# Altium PCB remote.PcbDoc (part 1 of 4)
Units mil, origin at the board's own origin, x right, y up, seen from the top; angles counter-clockwise.
Board outline 1653.54 x 3582.68 mil, 2 copper layers (Top Layer, Bottom Layer); 71 components, 53 nets, 248 pads, 250 vias.
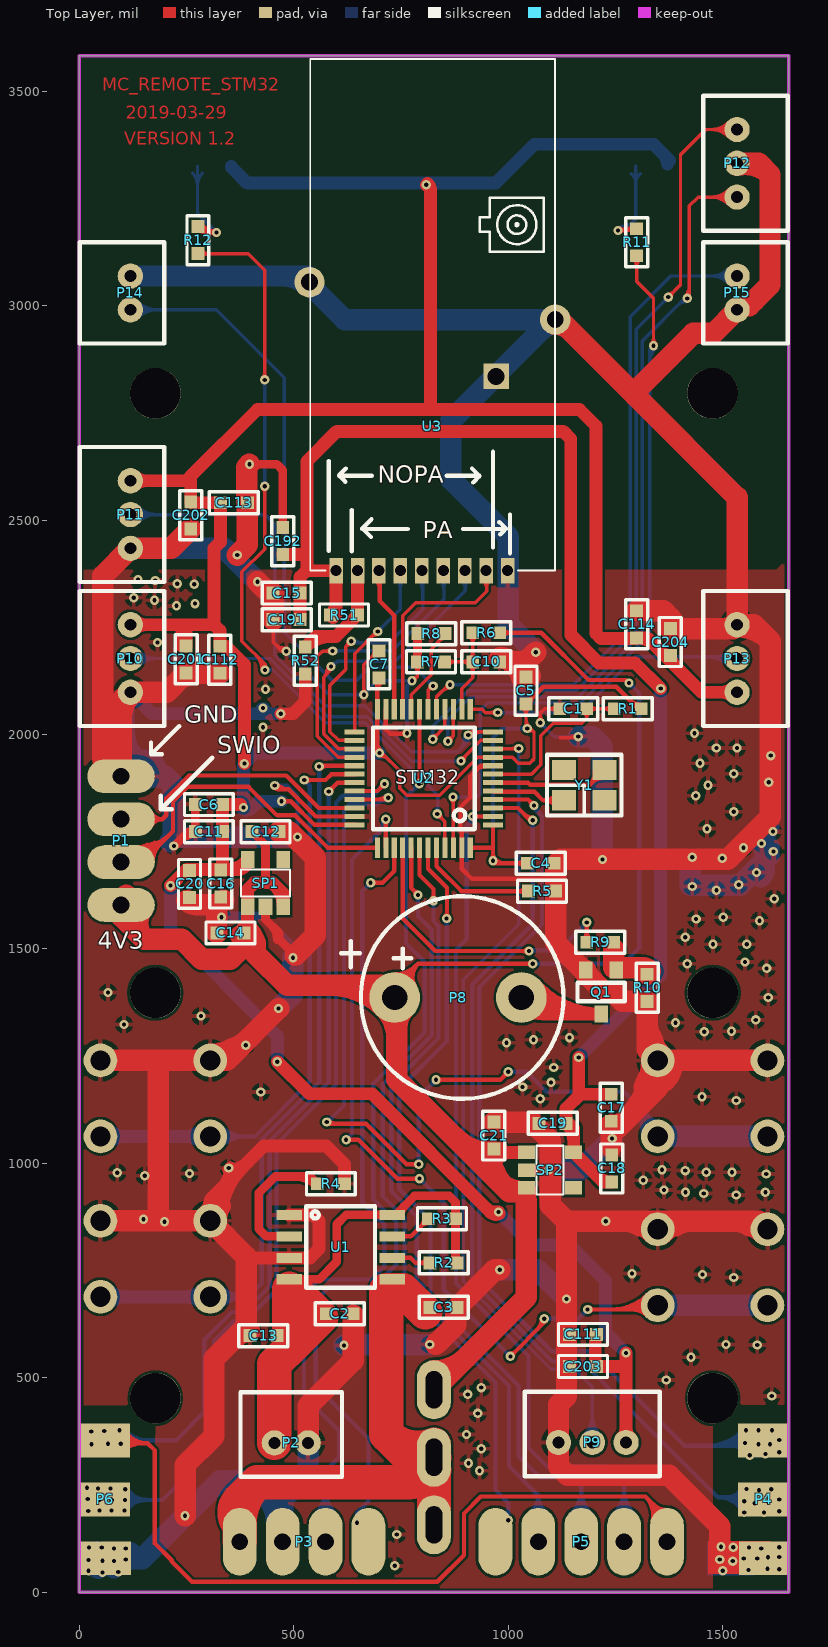
[diagram p0: Top Layer view]
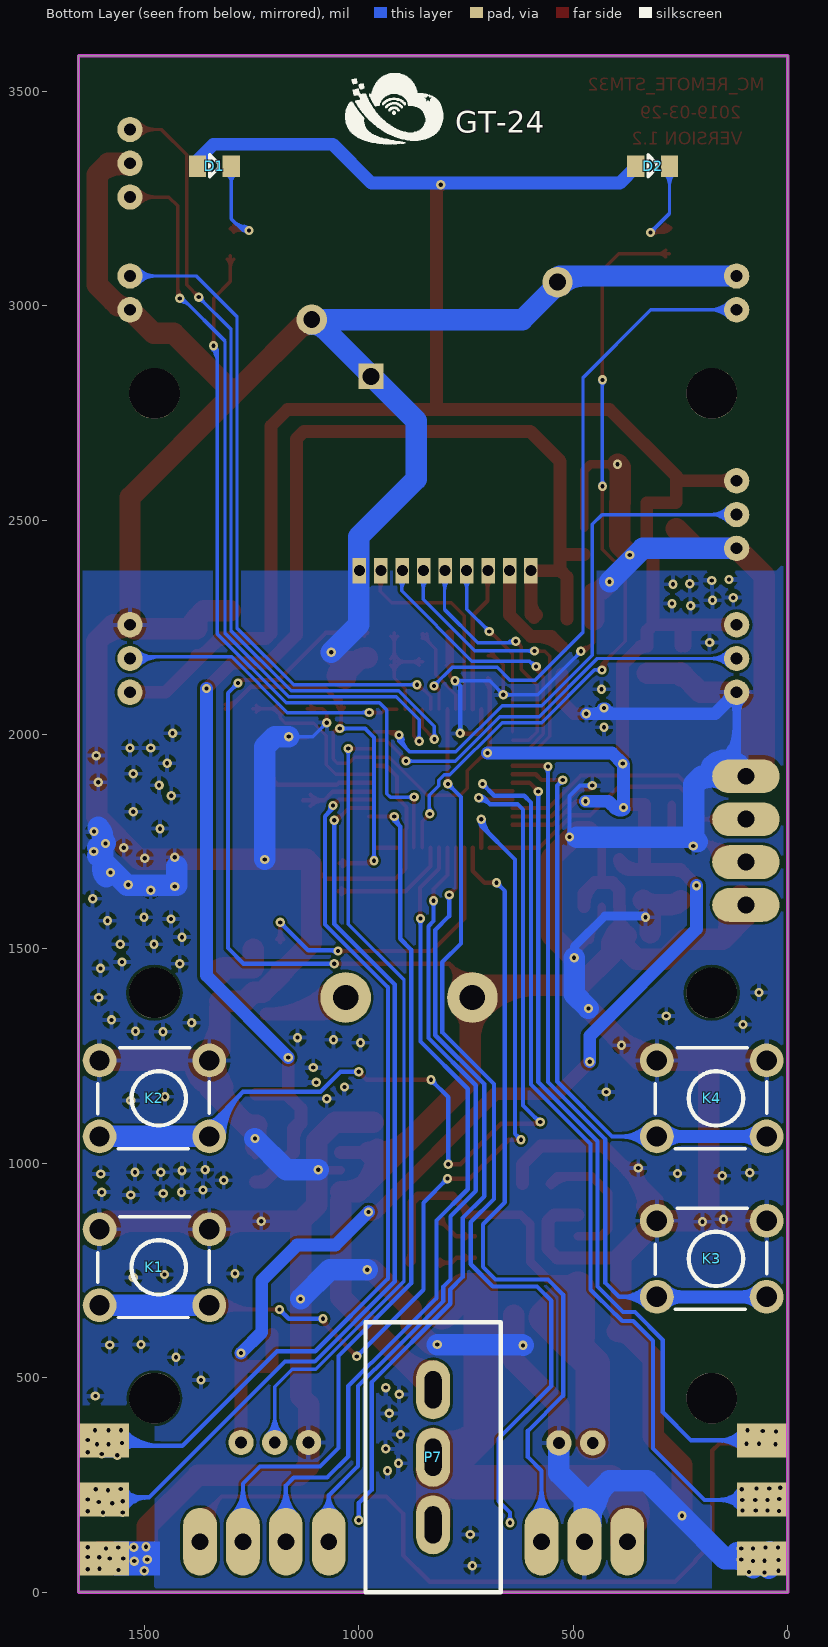
[diagram p1: Bottom Layer view, seen from below]

## Layer stack, top to bottom
Top Layer: signal copper 1.4
Dielectric: dielectric 12.6, FR-4, Dk 4.8
Bottom Layer: signal copper 1.4

## Board outline
0,3582.68 1653.54,3582.68 1653.54,0.99 1653.54,0.98 1652.56,0 0,0

## Design rules (kind name [scope] priority, off if disabled: settings)
AssemblyTestPointUsage [All] p1 off:
AssemblyTestpoint [All] p1 off: testpointundercomponent=TRUE minsize=40 maxsize=100 preferedsize=60 minholesize=0 maxholesize=40 preferedholesize=32 testpointgrid=1 usegrid=TRUE gridtolerance=0.01 allowsidetop=TRUE allowsidebottom=TRUE
Clearance [All] p1: gap=6
ComponentClearance [All] p1 off: gap=10 collisioncheckmode=3 verticalgap=10 showdistances=FALSE
FabricationTestPointUsage [All] p1 off: valid=0 allowmultiple=FALSE
FabricationTestpoint [All] p1 off: side=3 testpointundercomponent=TRUE minsize=40 maxsize=100 preferedsize=60 minholesize=0 maxholesize=40 preferedholesize=32 testpointgrid=1 allowsidetop=TRUE allowsidebottom=TRUE usegrid=TRUE gridtolerance=0.01
Height [All] p1 off: minheight=0 maxheight=1000 prefheight=500
HoleSize [All] p1 off: absolutevalues=TRUE maxlimit=100 minlimit=1 maxpercent=80.000 minpercent=20.000
HoleToHoleClearance [All] p1 off: gap=1 allowstackedmicrovias=TRUE
LayerPairs [All] p1 off: enforce=TRUE
MinimumSolderMaskSliver [All] p1 off: minsoldermaskwidth=1
NetAntennae [All] p1 off: netantennaetolerance=0
PolygonConnect [All] p1: connectstyle=Relief reliefconductorwidth=10 reliefentries=4 polygonreliefangle="90 Angle" airgapwidth=10
RoutingVias [All] p1: holewidth=9.84 width=21.65 viastyle="Through Hole" minholewidth=9.84 minwidth=21.65 maxholewidth=28 maxwidth=50
SilkToSilkClearance [All] p1 off: silktosilkclearance=10
SilkToSolderMaskClearance [IsPad] p1 off: minsilkscreentomaskgap=1 clearancetoexposedcopper=TRUE
SolderMaskExpansion [All] p1: expansion=4
Width [All] p1: maxlimit=100 minlimit=7 preferedwidth=7 minimp=50.000000 maximp=50.000000 favimp=50.000000
15 further rules are at their usual default settings.

## Components (designator, comment, footprint, x,y, rotation, side; value= is the part's Value field where it differs from the comment)
C1 "C10uF" 0603C 1183.07,2060.04 r180 top
C2 "C10uF" 0603C 575.79,649.61 r0 top
C3 "C10uF" 0603C 817.91,664.37 r0 top
C4 "C0.1uF" 0603C 1107.28,1699.8 r180 top
C5 "C0.1uF" 0603C 1041.34,2133.86 r270 top
C6 "C0.1uF" 0603C 270.67,1836.61 r0 top
C7 "C0.1uF" 0603C 698.82,2194.88 r270 top
C10 "C10uF" 0603C 917.32,2169.29 r0 top
C11 "C0.1uF" 0603C 270.67,1773.62 r0 top
C12 "C10uF" 0603C 402.56,1773.62 r0 top
C13 "22uF" 0603C 460.63,598.43 r180 top
C14 "22uF" 0603C 383.86,1537.4 r180 top
C15 "C0.1uF" 0603C 451.77,2329.72 r0 top
C16 "C10uF" 0603C 329.72,1684.06 r270 top
C17 "C0.1uF" 0603C 1240.16,1098.43 r90 top
C18 "C10uF" 0603C 1241.14,956.69 r90 top
C19 "22uF" 0603C 1134.84,1093.5 r180 top
C20 "22uF" 0603C 256.89,1683.07 r270 top
C21 "C10uF" 0603C 966.54,1033.46 r90 top
C111 "C0.1uF" 0603C 1142.72,601.38 r0 top
C112 "C0.1uF" 0603C 327.76,2142.72 r90 top
C113 "C0.1uF" 0603C 391.73,2540.35 r180 top
C114 "C0.1uF" 0603C 1299.21,2288.39 r270 top
C191 "22uF" 0603C 514.76,2267.72 r180 top
C192 "22uF" 0603C 474.41,2419.29 r90 top
C201 "22uF" 0603C 249.02,2206.69 r270 top
C202 "22uF" 0603C 259.84,2542.32 r270 top
C203 "22uF" 0603C 1205.71,526.57 r180 top
C204 "22uF" 0603C 1377.95,2184.06 r90 top
D1 "LED" LED 1375.98,3324.8 r180 bottom locked
D2 "LED" LED 354.33,3324.8 r180 bottom locked
K1 "KEY-PB" SW-DIP 1604.33,669.29 r0 bottom locked
K2 "KEY-PB" SW-DIP 1604.33,1062.99 r0 bottom locked
K3 "KEY-PB" SW-DIP 305.12,688.98 r0 bottom locked
K4 "KEY-PB" SW-DIP 305.12,1062.99 r0 bottom locked
P1 "Head*4" HEAD4_SPE4#1 97.44,1902.56 r270 top
P2 "Head2" HEAD-2P-2.0 454.72,348.43 r0 top locked
P3 "Head*4" HEAD4_SPE4#2 374.02,118.11 r0 top locked
P4 "head*3" KEY_SPE2 1594.49,78.74 r0 top locked
P5 "HEAD5" HEAD5_SPE5 970.08,118.11 r0 top locked
P6 "head*3" KEY_SPE2 59.06,78.74 r0 top locked
P7 "head*3" SWITCH_3P 826.77,157.48 r180 bottom locked
P8 "Head2" BEEP 735.24,1386.81 r0 top
P9 "head*3" HEAD-3P-2.0 1117.13,349.41 r0 top locked
P10 "head*3" HEAD-3P-2.0 119.09,2098.43 r90 top locked
P11 "head*3" HEAD-3P-2.0 119.09,2434.06 r90 top locked
P12 "head*3" HEAD-3P-2.0 1533.46,3410.43 r270 top locked
P13 "head*3" HEAD-3P-2.0 1533.46,2255.91 r270 top locked
P14 "Head2" HEAD-2P-2.0 119.09,2990.16 r90 top locked
P15 "Head2" HEAD-2P-2.0 1533.46,3068.9 r270 top locked
Q1 "SI2302" SOT-23-3 1251.97,1450.79 r180 top
R1 "R10K" 0603R 1247.05,2060.04 r0 top
R2 "R1K" 0603R 817.91,768.21 r0 top
R3 "R1K" 0603R 813.98,871.06 r0 top
R4 "1K" 0603R 618.11,952.76 r180 top
R5 "R10K" 0603R 1047.24,1634.84 r0 top
R6 "R10K" 0603R 980.32,2237.2 r180 top
R7 "R10K" 0603R 788.39,2169.29 r0 top
R8 "1K" 0603R 789.37,2235.24 r0 top
R9 "R100R" 0603R 1246.06,1515.75 r180 top
R10 "R10K" 0603R 1323.82,1440.94 r270 top
R11 "R1K" 0603R 1299.21,3179.13 r270 top
R12 "R1K" 0603R 276.57,3184.06 r270 top
R51 "0R" 0603R 648.62,2278.54 r180 top
R52 "0R" 0603R 526.57,2140.75 r90 top
SP1 "SP6201-adj" SOT23-5 392.72,1598.43 r0 top
SP2 "SP6201-adj" SOT23-5 1042.32,1025.59 r270 top
U1 "TP4056" SOP-8 489.17,879.92 r0 top
U2 "STM32F103C8T6" STM32C8T6 769.69,1822.83 r0 top
U3 "NRF_PA" ? 648.62,2381.89 r0 top locked
Y1 "12M" XTAL3225 1129.92,1846.46 r0 top

## Footprints (in the part's own frame and the unit in brackets; to place one, negate y for a bottom-side part, rotate by r counter-clockwise, add the part's x,y. Pads: shape width x height; smd on the part's side, far side on the other; paste and mask are expansions set on the pad)
0603C [mil]
  rect 30x30 smd: 1(0,0) 2(62.99,0)
  silkscreen extent -26,-26 89,26
0603R [mil]
  rect 30x30 smd: 1(0,0) 2(62.99,0)
  silkscreen extent -26,-26 89,26
BEEP [mm]
  round 3 hole 1.5: 1(0,0) 2(7.5,0)
  silkscreen extent -2,-6 10,6
HEAD4_SPE4#1 [mm]
  oval 2x4 hole 1: 1(0,0) 2(2.54,0) 3(5.08,0) 4(7.62,0)
HEAD4_SPE4#2 [mm]
  oval 2x4 hole 1: 1(0,0) 2(2.54,0) 3(5.08,0)
  oval 2x4 smd: 4(7.62,0)
HEAD5_SPE5 [mm]
  oval 2x4 smd: 1(0,0)
  oval 2x4 hole 1: 2(2.54,0) 3(5.08,0) 4(7.62,0) 5(10.16,0)
HEAD-2P-2.0 [mm]
  round 1.5 hole 0.7: 1(0,0) 2(2,0)
  silkscreen extent -2,-2 4,3
HEAD-3P-2.0 [mm]
  round 1.5 hole 0.7: 1(0,0) 2(2,0) 3(4,0)
  silkscreen extent -2,-2 6,3
KEY_SPE2 [mm]
  rect 3x2 smd far side: 1(0,0) 2(0,3.5) 3(0,7)
  rect 3x2 smd: 1(0.05,0.025) 2(0,3.5) 3(0,7)
LED [mil]
  rect 40x50 smd: 1(0,0) 2(78.74,0)
  silkscreen extent 29,-25 49,27
SOP-8 [mm]
  rect 1.5x0.6 smd: 1(0,0) 2(0,-1.27) 3(0,-2.54) 4(0,-3.81) 5(6.096,-3.81) 6(6.096,-2.54) 7(6.096,-1.27) 8(6.096,0)
  silkscreen extent 1.02,-4.32 5.08,0.51
SOT23-5 [mm]
  rect 0.8x1 smd: 1(0,0) 2(1.05,0) 3(2.1,0) 4(2.1,2.8) 5(0,2.8)
  silkscreen extent -0.4,0.6 2.5,2.2
SOT-23-3 [mm]
  rect 0.8x1 smd: 1(0,0) 2(1.8,0) 3(0.9,2.6)
  silkscreen extent -0.5,0.75 2.3,1.85
STM32C8T6 [mm]
  rect 1.2x0.3 smd: 1(4.95,-0.85) 2(4.95,-0.35) 3(4.95,0.15) 4(4.95,0.65) 5(4.95,1.15) 6(4.95,1.65) 7(4.95,2.15) 8(4.95,2.65) 9(4.95,3.15) 10(4.95,3.65) 11(4.95,4.15) 12(4.95,4.65) 25(-3.25,4.65) 26(-3.25,4.15) 27(-3.25,3.65) 28(-3.25,3.15) 29(-3.25,2.65) 30(-3.25,2.15) 31(-3.25,1.65) 32(-3.25,1.15) 33(-3.25,0.65) 34(-3.25,0.15) 35(-3.25,-0.35) 36(-3.25,-0.85)
  rect 0.3x1.2 smd: 13(3.6,6) 14(3.1,6) 15(2.6,6) 16(2.1,6) 17(1.6,6) 18(1.1,6) 19(0.6,6) 20(0.1,6) 21(-0.4,6) 22(-0.9,6) 23(-1.4,6) 24(-1.9,6) 37(-1.9,-2.2) 38(-1.4,-2.2) 39(-0.9,-2.2) 40(-0.4,-2.2) 41(0.1,-2.2) 42(0.6,-2.2) 43(1.1,-2.2) 44(1.6,-2.2) 45(2.1,-2.2) 46(2.6,-2.2) 47(3.1,-2.2) 48(3.6,-2.2)
  silkscreen extent -2.16,-1.1 3.86,4.92
SW-DIP [mm]
  round 2 hole 1.2: 1(-6.5,0) 1(0,0) 2(-6.5,-4.5) 2(0,-4.5)
  silkscreen extent -6.5,-5.25 0.1,0.72
SWITCH_3P [mm]
  oval 2x3.5 hole 1 slot 2.2 at 90 deg: 1(0,0) 2(0,4) 3(0,8)
  silkscreen extent -4,-4 4,12
XTAL3225 [mm]
  rect 1.4x1.2 smd: 1(0,0) 2(2.4,0) 3(2.4,1.8) 4(0,1.8)
  silkscreen extent -1,-0.9 3.4,2.7
? [mm]
  rect 0.8x1.5 hole 0.65: 0(-1.27,0) 1(0,0) 2(1.27,0) 3(2.54,0) 4(3.81,0) 5(5.08,0) 6(6.35,0) 7(7.62,0) 8(8.89,0)
  round 1.8 hole 1: 9(-2.844,17.084) 10(11.708,14.87)
  rect 1.5x1.5 hole 1: 9(8.206,11.507)
  silkscreen extent -2.81,0.01 11.69,30.3

## Part data
C13 C14 C19 C20 C191 C192 C201 C202 C203 C204: library part C100uF
Q1: library part MOSFET-N
R4: library part R1K
R6 R7: library part R100K
R8 R51 R52: library part R10K
SP1 SP2: library part SP6201
Y1: library part CRYSTAL, "Crystal"

## Free pads (board coordinates)
  round 118.11 hole 118.11: 0(177.16,452.76) 0(177.16,1397.64) 0(177.16,2795.28) 0(1476.38,452.76) 0(1476.38,1397.64) 0(1476.38,2795.28)

## Via types
v1: diameter 21.65, hole 9.84, Top Layer to Bottom Layer, tented both sides, 241 vias
v2: diameter 21.65, hole 9.84, Top Layer to Bottom Layer, 9 vias

## Nets (pads, with @x,y where several pads share a name; then routed paths per layer and width w, separated by ;. In a path a pad name is that pad's centre, name@x,y a point inside that pad or via, vN(x,y) a via of type N, cw(c..) or ccw(c..) an arc to the next point about the centre after c; other vN are vias at no path point)
2V8: C4.2 C5.2 C6.2 C7.2 C11.2 C16.1 C20.1 C111.2 C112.2 C113.2 C114.2 C201.1 C202.1 C203.1 C204.1 D1.1 D2.1 P9.3 P10.3 P11.3 P13.3 R1.2 SP1.5 U2.1 U2.9 U2.24 U2.36 U2.48 | length 11625.4
  Top Layer w8: v1(699.8,1956.69) 705.71,1956.69 747.05,1915.35 747.05,1875 763.78,1858.27 840.55,1858.27 929.13,1946.85 1009.84,1946.85 1023.62,1933.07 1050.2,1933.07 1060.04,1942.91 1060.04,2005.41 ; v1@1041.34,2024.11 C5.2@1041.34,2070.87 ; v1@1047.98,2017.47 1060.04,2005.41 ; 1041.34,2044.31 cw(c1067.9,2044.31) 1049.12,2063.09 ccw(c1067.9,2044.31) 1041.34,2044.31 ; 1041.34,2044.31 ccw(c1014.78,2044.31) 1033.56,2063.09 cw(c1014.78,2044.31) 1041.34,2044.31 ; 1060.04,2005.41 ccw(c1052.07,1997.45) 1047.23,2007.62 cw(c1052.07,1997.45) 1060.04,2005.41 ; v1@699.8,1949.87 cw(c699.8,1919.13) 721.54,1940.86 ccw(c699.8,1919.13) v1@699.8,1949.87 ; 1041.34,2037.39 ccw(c1067.9,2037.39) 1049.12,2018.61 cw(c1067.9,2037.39) 1041.34,2037.39
  Top Layer w10: v1@375.98,1829.72 v1(382.87,1829.72) ; v1(471.46,1844.49) 493.11,1844.49 548.23,1789.37 U2.36@641.73,1789.37 ; C7.2@698.82,2131.89 694.88,2127.95 694.88,1961.61 v1(699.8,1956.69) ; U2.48@911.42,1736.22 960.63,1736.22 964.57,1740.16 ; U2.1@964.57,1789.37 964.57,1740.16 ; C5.2@1041.34,2070.87 1081.69,2111.22 1251.97,2111.22 1303.15,2060.04 R1.2@1310.04,2060.04 ; C4.2@1044.29,1699.8 970.47,1699.8 v1(964.57,1705.71) 964.57,1740.16 ; 485.52,1844.49 cw(c485.52,1858.56) 475.58,1848.61 ccw(c485.52,1858.56) 485.52,1844.49 ; 485.52,1844.49 ccw(c485.52,1830.42) 475.58,1840.37 cw(c485.52,1830.42) 485.52,1844.49 ; 964.57,1719.78 cw(c950.5,1719.78) 960.45,1709.83 ccw(c950.5,1719.78) 964.57,1719.78 ; 964.57,1719.78 ccw(c978.63,1719.78) v1@968.69,1709.83 ; 964.57,1719.78 ccw(c978.63,1719.78) v1@968.69,1709.83 ; v1@968.69,1709.83 ccw(c992.89,1734.04) 992.89,1699.8 cw(c992.89,1734.04) v1@968.69,1709.83 ; 1020.15,1699.8 cw(c1020.15,1675.66) 1037.22,1692.73 ccw(c1020.15,1675.66) 1020.15,1699.8 ; 1020.15,1699.8 ccw(c1020.15,1723.95) 1037.22,1706.87 cw(c1020.15,1723.95) 1020.15,1699.8 ; 1058.41,2087.94 cw(c1041.34,2105) 1041.34,2080.87 ccw(c1041.34,2105) 1058.41,2087.94 ; 1058.41,2087.94 ccw(c1075.49,2070.87) 1051.34,2070.87 cw(c1075.49,2070.87) 1058.41,2087.94 ; C7.2@691.75,2124.82 cw(c684.18,2117.25) 694.88,2117.25 ccw(c684.18,2117.25) C7.2@691.75,2124.82 ; 694.88,1982.64 ccw(c725.75,1982.64) 703.92,1960.81 cw(c725.75,1982.64) 694.88,1982.64 ; 694.88,2098.24 cw(c732.46,2098.24) 705.89,2124.82 ccw(c732.46,2098.24) 694.88,2098.24 ; 1281.21,2081.98 ccw(c1310.04,2110.81) 1310.04,2070.04 cw(c1310.04,2110.81) 1281.21,2081.98
  Top Layer w30: P10.3@119.09,2255.91 255.91,2255.9 ; P11.3@119.09,2591.54 257.87,2591.53 257.87,2600.39 259.84,2602.36 ; v1(212.6,1647.64) 250,1685.04 C16.1@334.65,1685.04 ; C201.1@239.17,2206.69 239.17,2254.92 ; C11.2@334.65,1774.61 C11.2@333.66,1773.62 ; 343.11,2205.2 384.84,2163.46 v1(384.84,1932.09) ; v1@375.98,1836.61 C6.2@333.66,1836.61 C11.2@333.66,1773.62 ; SP1.5@392.72,1708.66 369.09,1685.04 ; v1(461.61,1237.2) 536.42,1162.4 682.09,1162.4 957.68,886.81 ; v1(809.06,3281.5) 818.9,3271.65 818.9,2757.87 ; v1(977.36,886.81) 957.68,886.81 ; C111.2@1202.76,601.38 1202.76,529.53 C203.1@1205.71,526.57 1272.64,526.57 ; P9.3@1274.61,349.41 v1(1274.61,558.07) ; C114.2@1299.21,2223.43 1216.54,2223.43 1204.72,2235.24 1204.72,2719.49 1166.34,2757.87 818.9,2757.87 ; P13.3@1533.46,2098.43 1450.79,2098.42 1323.82,2225.39 C114.2@1299.21,2225.39 ; 154.17,2255.9 cw(c154.17,2290.98) 129.36,2266.18 ccw(c154.17,2290.98) 154.17,2255.9 ; 154.16,2255.9 ccw(c154.16,2220.84) 129.36,2245.63 cw(c154.16,2220.84) 154.16,2255.9 ; 154.17,2591.53 cw(c154.17,2626.61) 129.37,2601.81 ccw(c154.17,2626.61) 154.17,2591.53 ; 154.17,2591.53 ccw(c154.17,2556.46) 129.37,2581.26 cw(c154.17,2556.46) 154.17,2591.53 ; C201.1@249.02,2206.69 cw(c272.78,2230.45) 239.17,2230.45 ccw(c272.78,2230.45) C201.1@249.02,2206.69 ; C201.1@249.02,2206.69 249.02,2249.01 255.91,2255.9 ; 255.91,2255.9 313.98,2255.9 ; 259.84,2602.36 C202.1@259.84,2542.32 261.81,2540.35 C113.2@328.74,2540.35 328.74,2448.82 313.98,2434.06 313.98,2255.9 ; 259.84,2602.36 415.35,2757.87 818.9,2757.87 ; 313.98,2255.9 327.76,2242.13 C112.2@327.76,2205.71 ; C112.2@327.76,2205.71 cw(c327.76,2169.88) 353.09,2195.21 ccw(c327.76,2169.88) C112.2@327.76,2205.71 ; C11.2@333.66,1773.62 333.66,1686.02 C16.1@334.65,1685.04 ; C16.1@334.65,1685.04 369.09,1685.04 ; 369.09,1685.04 ccw(c369.09,1708.16) 391.98,1704.83 cw(c369.09,1708.16) 369.09,1685.04 ; v1@812.01,3284.45 cw(c795.37,3267.81) 818.9,3267.81 ; v1@812.01,3284.45 cw(c795.37,3267.81) 818.9,3267.81 ; v1@812.01,3284.45 cw(c795.37,3267.81) 818.9,3267.81 ; v1@812.01,3284.45 cw(c795.37,3267.81) 818.9,3267.81 ; 957.68,886.81 ccw(c971.1,900.24) 979.13,883.03 cw(c971.1,900.24) 957.68,886.81 ; 1274.61,384.48 cw(c1239.53,384.48) 1264.33,359.68 ccw(c1239.53,384.48) 1274.61,384.48 ; 1274.61,384.48 ccw(c1309.68,384.48) 1284.88,359.68 cw(c1309.68,384.48) 1274.61,384.48 ; C114.2@1299.21,2225.39 cw(c1299.21,2165.99) 1341.22,2207.99 ccw(c1299.21,2165.99) C114.2@1299.21,2225.39 ; C204.1@1377.95,2184.06 cw(c1377.95,2214.95) 1356.11,2193.1 ccw(c1377.95,2214.95) C204.1@1377.95,2184.06 ; C204.1@1377.95,2184.06 ccw(c1408.84,2184.06) 1387,2162.21 cw(c1408.84,2184.06) C204.1@1377.95,2184.06 ; 1498.39,2098.42 cw(c1498.39,2063.35) 1523.19,2088.15 ccw(c1498.39,2063.35) 1498.39,2098.42 ; 1498.39,2098.42 ccw(c1498.39,2133.5) 1523.19,2108.7 cw(c1498.39,2133.5) 1498.39,2098.42 ; 241.77,1676.81 cw(c256.89,1661.69) C20.1@256.89,1683.07 ccw(c256.89,1661.69) 241.77,1676.81 ; C16.1@343.39,1685.04 ccw(c343.39,1754.05) 392.19,1705.25 cw(c343.39,1754.05) C16.1@343.39,1685.04 ; 950.88,893.61 ccw(c977.36,920.09) 977.36,882.64 cw(c977.36,920.09) 950.88,893.61
  Bottom Layer w10: v1(964.57,1705.71) 964.57,1993.11 985.24,2013.78 v1(1044.29,2013.78) ; 964.57,1719.78 cw(c950.5,1719.78) 960.45,1709.83 ccw(c950.5,1719.78) 964.57,1719.78 ; 964.57,1719.78 ccw(c978.63,1719.78) 968.69,1709.83 cw(c978.63,1719.78) 964.57,1719.78 ; 1030.22,2013.78 cw(c1030.22,1999.71) 1040.17,2009.66 ccw(c1030.22,1999.71) 1030.22,2013.78 ; 1030.22,2013.78 ccw(c1030.22,2027.85) 1040.17,2017.9 cw(c1030.22,2027.85) 1030.22,2013.78
  Bottom Layer w30: P11.3@119.09,2591.54 P11.3@119.09,2595.47 ; v1(212.6,1647.64) 212.6,1546.26 461.61,1297.24 v1(461.61,1237.2) ; D2.1@354.33,3324.8 354.33,3322.83 391.73,3285.43 970.47,3285.43 1061.02,3375.98 1338.58,3375.98 D1.1@1375.98,3338.58 ; v1@382.87,1930.12 v1(382.87,1829.72) 403.54,1829.72 ; v1(384.84,1932.09) 409.78,1957.02 699.47,1957.02 v1(699.8,1956.69) ; v1(471.46,1844.49) 418.31,1844.49 403.54,1829.72 ; v1(977.36,886.81) 1054.13,810.04 1143.7,810.04 1226.38,727.36 1226.38,606.3 v1(1274.61,558.07) ; 403.54,1829.72 cw(c389.67,1843.6) 381.04,1825.98 ccw(c389.67,1843.6) 403.54,1829.72 ; v1@382.87,1825.55 ccw(c382.87,1865.38) 411.03,1837.22 cw(c382.87,1865.38) v1@382.87,1825.55 ; 1361.24,3353.33 cw(c1337.72,3329.8) 1370.98,3329.8 ccw(c1337.72,3329.8) 1361.24,3353.33
4V3: C12.1 C14.1 C21.1 P1.4 P7.3 P8.1 R6.1 SP1.1 SP1.3 SP2.1 SP2.3 | length 6810.1
  Top Layer w10: P8.1@721.46,1397.64 789.37,1465.55 ; R6.1@980.32,2237.2 1076.77,2237.2 1186.76,2127.22 1274.35,2127.22 v1(1281.5,2120.08) ; v1(1057.09,1465.55) 789.37,1465.55 ; 789.37,1465.55 ccw(c820.08,1434.83) 782.28,1413.44 cw(c820.08,1434.83) 789.37,1465.55 ; 1004.46,2237.2 cw(c1004.46,2261.35) 987.39,2244.28 ccw(c1004.46,2261.35) 1004.46,2237.2 ; 1004.46,2237.2 ccw(c1004.46,2213.06) 987.39,2230.13 cw(c1004.46,2213.06) 1004.46,2237.2 ; 1043.02,1465.55 cw(c1043.02,1451.48) 1052.97,1461.43 ccw(c1043.02,1451.48) 1043.02,1465.55 ; 1043.02,1465.55 ccw(c1043.02,1479.62) 1052.97,1469.67 cw(c1043.02,1479.62) 1043.02,1465.55 ; P8.1@735.24,1430.87 ccw(c735.24,1477.82) 768.44,1444.62 cw(c735.24,1477.82) P8.1@735.24,1430.87 ; P8.1@735.24,1440.87 ccw(c735.24,1511.96) 785.51,1461.69 cw(c735.24,1511.96) P8.1@735.24,1440.87 ; P8.1@764.87,1403.59 cw(c796.34,1421.39) 770.77,1446.95 ccw(c796.34,1421.39) P8.1@764.87,1403.59 ; P8.1@773.58,1408.51 cw(c808.21,1428.11) 780.07,1456.25 ccw(c808.21,1428.11) P8.1@773.58,1408.51
  Top Layer w20: C12.1@402.56,1773.62 434.06,1742.13 434.06,1654.53
  Top Layer w30: SP1.1@391.73,1597.44 391.73,1533.46 403.54,1521.65 ; SP1.1@392.72,1598.43 392.72,1638.78 408.46,1654.53 434.06,1654.53 449.8,1654.53 475.39,1628.94 SP1.3@475.39,1598.43 ; C21.1@977.36,1025.59 SP2.1@1042.32,1025.59 ; C14.1@383.86,1537.4 ccw(c364.85,1556.41) 391.73,1556.41 cw(c364.85,1556.41) C14.1@383.86,1537.4 ; 455.33,1649 cw(c408.69,1602.36) 474.65,1602.36 ccw(c408.69,1602.36) 455.33,1649 ; C21.1@966.54,1033.46 ccw(c985.55,1052.47) 985.55,1025.59 cw(c985.55,1052.47) C21.1@966.54,1033.46
  Top Layer w50: P1.4@97.44,1602.56 97.44,1576.77 151.57,1522.64 ; P7.3@826.77,472.44 1042.32,687.99 1042.32,912.85 ; 949.8,1020.67 948.82,1019.68 971.45,1019.68 C21.1@977.36,1025.59 ; SP2.3@1042.32,934.06 1001.97,934.06 740.16,1195.87 740.16,1378.94 721.46,1397.64 703.74,1415.35 484.25,1415.35 410.43,1489.17 410.43,1514.76 403.54,1521.65 397.64,1521.65 352.36,1476.38 285.43,1476.38 239.17,1522.64 151.57,1522.64 ; 151.57,1522.64 cw(c189,1560.07) 147.95,1593.49 ccw(c189,1560.07) 151.57,1522.64 ; P8.1@711.16,1362.73 cw(c641.14,1292.71) 740.16,1292.71 ccw(c641.14,1292.71) P8.1@711.16,1362.73 ; P8.1@711.16,1362.73 ccw(c584.11,1235.69) 584.11,1415.35 cw(c584.11,1235.69) P8.1@711.16,1362.73 ; P1.4@109.18,1625.06 ccw(c145.83,1595.22) 112.41,1561.8 cw(c145.83,1595.22) P1.4@109.18,1625.06 ; C14.1@376.79,1530.33 ccw(c397.74,1551.28) 397.74,1521.65 cw(c397.74,1551.28) C14.1@376.79,1530.33 ; 380.05,1504.07 ccw(c346.71,1537.4) 393.86,1537.4 cw(c346.71,1537.4) 380.05,1504.07 ; C14.1@390.18,1545.15 cw(c355.38,1502.49) 410.43,1502.49 ccw(c355.38,1502.49) C14.1@390.18,1545.15 ; C14.1@390.93,1544.47 cw(c343.84,1497.39) 410.43,1497.39 ccw(c343.84,1497.39) C14.1@390.93,1544.47 ; 740.16,1316.48 cw(c805.57,1316.48) 759.32,1362.73 ccw(c805.57,1316.48) 740.16,1316.48 ; P7.3@826.77,516.34 ccw(c826.77,622.32) 901.71,547.38 cw(c826.77,622.32) P7.3@826.77,516.34 ; 874.39,1061.63 ccw(c966.54,1153.78) 966.54,1023.46 cw(c966.54,1153.78) 874.39,1061.63 ; C21.1@956.54,1033.46 ccw(c1086.85,1033.46) 994.7,941.32 cw(c1086.85,1033.46) C21.1@956.54,1033.46 ; C21.1@957.41,1019.68 ccw(c957.41,1042.59) 973.61,1026.39 cw(c957.41,1042.59) C21.1@957.41,1019.68 ; 976.89,959.13 ccw(c1038.39,1020.63) 1038.39,933.66 cw(c1038.39,1020.63) 976.89,959.13
  Bottom Layer w10: v1(1057.09,1465.55) 1268.7,1465.55 1305.18,1502.03 1305.18,2096.39 v1(1281.5,2120.08) ; 1071.15,1465.55 cw(c1071.15,1479.62) 1061.21,1469.67 ccw(c1071.15,1479.62) 1071.15,1465.55 ; 1071.15,1465.55 ccw(c1071.15,1451.48) 1061.21,1461.43 cw(c1071.15,1451.48) 1071.15,1465.55 ; 1291.44,2110.13 cw(c1301.39,2120.08) 1287.32,2120.08 ccw(c1301.39,2120.08) 1291.44,2110.13 ; 1291.44,2110.13 ccw(c1281.5,2100.19) 1281.5,2114.25 cw(c1281.5,2100.19) 1291.44,2110.13
AD0: P9.2 U2.10 | length 2319.8
  Top Layer w8: U2.10@964.57,1966.54 1023.62,1966.54 v1(1024.61,1967.52) ; 1005.75,1966.54 ccw(c1005.75,1986.37) 1019.78,1972.35 cw(c1005.75,1986.37) 1005.75,1966.54 ; 1010.5,1966.54 cw(c1010.5,1953.41) 1019.78,1962.69 ccw(c1010.5,1953.41) 1010.5,1966.54
  Bottom Layer w8: v1(1024.61,1967.52) 1024.61,1558.07 894.69,1428.15 894.69,724.95 1099.95,519.68 1155.51,519.68 1195.87,479.33 P9.2@1195.87,349.41 ; 1024.61,1951.04 cw(c1041.09,1951.04) 1029.43,1962.69 ccw(c1041.09,1951.04) 1024.61,1951.04 ; 1024.61,1951.04 ccw(c1008.13,1951.04) 1019.78,1962.69 cw(c1008.13,1951.04) 1024.61,1951.04 ; 1195.87,391.73 cw(c1153.55,391.73) 1183.47,361.8 ccw(c1153.55,391.73) 1195.87,391.73 ; 1195.87,391.72 ccw(c1238.18,391.72) 1208.26,361.8 cw(c1238.18,391.72) 1195.87,391.72 ; 1195.87,411.04 cw(c1134.24,411.04) 1177.82,367.46 ccw(c1134.24,411.04) 1195.87,411.04 ; 1195.87,411.04 ccw(c1257.49,411.04) 1213.92,367.46 cw(c1257.49,411.04) 1195.87,411.04
AD1: P10.2 U2.11 | length 1408.5
  Top Layer w8: v1(889.81,1938.09) 889.81,1940 936.02,1986.22 U2.11@964.57,1986.22 ; v1@890.15,1936.96 ccw(c886.49,1949.06) 898.7,1945.79 ; v1@889.81,1944.91 ccw(c889.81,1956.77) 898.19,1948.38 cw(c889.81,1956.77) v1@889.81,1944.91 ; v1@896.63,1938.09 cw(c917.74,1938.09) 902.82,1953.01 ccw(c917.74,1938.09) v1@896.63,1938.09
  Bottom Layer w8: P10.2@119.09,2177.17 443.78,2177.16 579.34,2041.61 671.86,2041.61 775.38,1938.09 v1(889.81,1938.09) ; 161.41,2177.16 cw(c161.41,2219.48) 131.48,2189.56 ccw(c161.41,2219.48) 161.41,2177.16 ; 161.4,2177.16 ccw(c161.4,2134.85) 131.48,2164.77 cw(c161.4,2134.85) 161.4,2177.16 ; 180.72,2177.16 cw(c180.72,2238.8) 137.14,2195.22 ccw(c180.72,2238.8) 180.72,2177.16 ; 180.72,2177.16 ccw(c180.72,2115.54) 137.14,2159.11 cw(c180.72,2115.54) 180.72,2177.16 ; 873.33,1938.09 cw(c873.33,1921.61) 884.98,1933.26 ccw(c873.33,1921.61) 873.33,1938.09 ; 873.33,1938.09 ccw(c873.33,1954.57) 884.98,1942.91 cw(c873.33,1954.57) 873.33,1938.09
AD2: P11.2 U2.12 | length 1962.6
  Top Layer w8: v1(906.5,1999.02) 913.39,2005.91 U2.12@964.57,2005.91 ; v1@911.01,2004.13 ccw(c919.53,2013.78) 925.96,2002.64 ; v1@905.67,1999.85 cw(c920.3,1985.21) 920.3,2005.91 ccw(c920.3,1985.21) v1@905.67,1999.85 ; v1@911.32,1994.19 cw(c939.61,1965.9) 939.61,2005.91 ccw(c939.61,1965.9) v1@911.32,1994.19
  Bottom Layer w8: P11.2@119.09,2512.8 433.07,2512.79 455.71,2490.16 455.71,2185.04 573.38,2067.36 665.9,2067.36 773.62,1959.65 881.89,1959.65 906.5,1984.25 ; 891.74,1969.43 cw(c929.41,1959.33) 909.91,1993.1 ccw(c916.22,1982.18) 904.03,1985.45 ; 896.74,1988.08 cw(c915.75,1982.99) v1@905.91,2000.03 ; v1@901.41,1994.46 cw(c893.39,1987.29) 903.78,1984.51 ; v1(906.5,1999.02) 906.5,1984.25 ; 161.41,2512.79 cw(c161.41,2555.11) 131.49,2525.19 ccw(c161.41,2555.11) 161.41,2512.79 ; 161.41,2512.79 ccw(c161.41,2470.48) 131.49,2500.4 cw(c161.41,2470.48) 161.41,2512.79 ; 180.72,2512.79 cw(c180.72,2574.43) 137.15,2530.85 ccw(c180.72,2574.43) 180.72,2512.79 ; 180.72,2512.79 ccw(c180.72,2451.17) 137.15,2494.74 cw(c180.72,2451.17) 180.72,2512.79 ; 906.5,1984.25 cw(c919.05,1984.25) 910.92,1993.81 ccw(c919.05,1984.25) 906.5,1984.25 ; 906.5,1984.25 ccw(c893.95,1984.25) 902.07,1993.81 cw(c893.95,1984.25) 906.5,1984.25 ; 884.4,1962.16 ccw(c847.55,1999.02) 899.67,1999.02 cw(c847.55,1999.02) 884.4,1962.16 ; 898.06,1975.82 ccw(c874.86,1999.02) 907.67,1999.02 cw(c874.86,1999.02) 898.06,1975.82
AD3: P13.2 U2.13 | length 1168.1
  Top Layer w8: U2.13@911.42,2059.05 938.98,2059.05 946.85,2051.18 v1(975.39,2051.18) ; 958.91,2051.18 cw(c958.91,2034.7) 970.57,2046.35 ccw(c958.91,2034.7) 958.91,2051.18 ; 958.91,2051.18 ccw(c958.91,2067.66) 970.57,2056.01 cw(c958.91,2067.66) 958.91,2051.18
  Bottom Layer w8: v1(975.39,2051.18) 1166.34,2051.18 1296.26,2181.1 1529.53,2181.1 P13.2@1533.46,2177.17 ; 991.87,2051.18 cw(c991.87,2067.66) 980.22,2056.01 ccw(c991.87,2067.66) 991.87,2051.18 ; 991.87,2051.18 ccw(c991.87,2034.7) 980.22,2046.35 cw(c991.87,2034.7) 991.87,2051.18 ; 1462.33,2181.1 cw(c1462.33,2106.03) 1515.41,2159.11 ccw(c1462.33,2106.03) 1462.33,2181.1 ; 1481.34,2181.1 ccw(c1481.34,2229.29) 1515.41,2195.22 cw(c1481.34,2229.29) 1481.34,2181.1 ; 1481.64,2181.1 cw(c1481.64,2125.35) 1521.07,2164.77 ccw(c1481.64,2125.35) 1481.64,2181.1 ; 1500.65,2181.1 ccw(c1500.65,2209.98) 1521.07,2189.56 cw(c1500.65,2209.98) 1500.65,2181.1 ; 1500.96,2181.1 cw(c1500.96,2144.66) 1526.73,2170.43 ccw(c1500.96,2144.66) 1500.96,2181.1
AD-BAT: C10.1 R6.2 R7.2 U2.14 | length 671.8
  Top Layer w8: R7.2@851.38,2169.29 C10.1@917.32,2169.29 ; U2.14@891.73,2059.05 891.73,2106.3 917.32,2131.89 C10.1@917.32,2169.29 ; R6.2@917.32,2237.2 C10.1@917.32,2169.29 ; 877.94,2169.29 cw(c877.94,2195.85) 859.16,2177.07 ccw(c877.94,2195.85) 877.94,2169.29 ; 877.93,2169.29 ccw(c877.93,2142.74) 859.16,2161.51 cw(c877.93,2142.74) 877.93,2169.29 ; 890.77,2169.29 cw(c890.77,2142.74) C10.1@909.54,2161.51 ; 890.76,2169.29 ccw(c890.76,2195.85) C10.1@909.54,2177.07 ; 890.77,2169.29 cw(c890.77,2142.74) C10.1@909.54,2161.51 ; 890.76,2169.29 ccw(c890.76,2195.85) C10.1@909.54,2177.07 ; C10.1@909.54,2161.51 cw(c890.77,2142.74) 917.32,2142.74 ; C10.1@909.54,2161.51 cw(c890.77,2142.74) 917.32,2142.74 ; C10.1@909.54,2177.07 ccw(c890.77,2195.85) 917.32,2195.85 ; C10.1@909.54,2177.07 ccw(c890.77,2195.85) 917.32,2195.85 ; 917.32,2142.73 cw(c943.88,2142.73) 925.1,2161.51 ccw(c943.88,2142.73) 917.32,2142.73 ; 917.32,2195.85 ccw(c943.88,2195.85) 925.1,2177.07 cw(c943.88,2195.85) 917.32,2195.85 ; 917.32,2210.65 cw(c943.88,2210.65) 925.1,2229.43 ccw(c943.88,2210.65) 917.32,2210.65 ; 917.32,2210.65 ccw(c890.77,2210.65) 909.54,2229.43 cw(c890.77,2210.65) 917.32,2210.65
BEEP: R9.2 U2.40 | length 940.5
  Top Layer w10: U2.40@753.94,1736.22 753.94,1570.87 829.65,1495.15 v1(1048.28,1495.15) ; R9.2@1183.07,1515.75 v1(1183.07,1562.01) ; 1034.21,1495.15 cw(c1034.21,1481.08) 1044.16,1491.03 ccw(c1034.21,1481.08) 1034.21,1495.15 ; 1034.21,1495.15 ccw(c1034.21,1509.22) 1044.16,1499.27 cw(c1034.21,1509.22) 1034.21,1495.15 ; 1183.07,1539.89 cw(c1158.93,1539.89) 1176,1522.82 ccw(c1158.93,1539.89) 1183.07,1539.89 ; 1183.07,1539.89 ccw(c1207.21,1539.89) 1190.14,1522.82 cw(c1207.21,1539.89) 1183.07,1539.89 ; 1183.07,1547.94 cw(c1197.14,1547.94) 1187.19,1557.89 ccw(c1197.14,1547.94) 1183.07,1547.94 ; 1183.07,1547.94 ccw(c1169.01,1547.94) 1178.95,1557.89 cw(c1169.01,1547.94) 1183.07,1547.94
  Bottom Layer w10: v1(1048.28,1495.15) 1050.18,1497.05 1118.11,1497.05 v1(1183.07,1562.01) ; 1173.12,1552.06 cw(c1183.07,1542.11) 1183.07,1556.18 ccw(c1183.07,1542.11) 1173.12,1552.06 ; 1173.12,1552.06 ccw(c1163.18,1562.01) 1177.24,1562.01 cw(c1163.18,1562.01) 1173.12,1552.06 ; v1@1052.4,1491.03 cw(c1066.92,1476.51) 1066.92,1497.05 ccw(c1066.92,1476.51) v1@1052.4,1491.03
CE: U2.22 U3.2 | length 426.1
  Top Layer w10: U3.2@700.2,2389.57 700.2,2311.61 734.25,2277.56 U2.22@734.25,2059.05 ; U3.2@691.02,2360.51 cw(c668.87,2338.36) 700.2,2338.36 ccw(c668.87,2338.36) U3.2@691.02,2360.51 ; 700.2,2345.96 cw(c720.77,2345.96) 706.22,2360.51 ccw(c720.77,2345.96) 700.2,2345.96
CH5-0: P12.3 U2.15 | length 2413.1
  Top Layer w8: v1@858.1,1984.49 cw(c868.86,1982.28) 866.02,1992.89 ; v1(859.25,1984.25) 872.05,1997.05 U2.15@872.05,2059.05 ; v1@859.49,1983.1 ccw(c857.28,1993.86) 867.89,1991.02 ; v1(1417.32,3016.73) 1422.24,3021.65 1422.24,3232.28 1442.91,3252.95 P12.3@1533.46,3252.95 ; 1419.21,3033.18 ccw(c1426.55,3028.94) v1@1421.44,3022.18 ; 870.91,1995.91 cw(c859.25,2007.56) 859.25,1991.08 ccw(c859.25,2007.56) 870.91,1995.91 ; 870.91,1995.91 ccw(c882.56,1984.25) 866.08,1984.25 cw(c882.56,1984.25) 870.91,1995.91 ; 1471.84,3252.95 cw(c1471.84,3191.33) 1515.41,3234.9 ccw(c1471.84,3191.33) 1471.84,3252.95 ; 1471.83,3252.95 ccw(c1471.83,3314.58) 1515.41,3271 cw(c1471.83,3314.58) 1471.83,3252.95 ; 1491.15,3252.95 cw(c1491.15,3210.64) 1521.07,3240.56 ccw(c1491.15,3210.64) 1491.15,3252.95 ; 1491.15,3252.95 ccw(c1491.15,3295.27) 1521.07,3265.35 cw(c1491.15,3295.27) 1491.15,3252.95 ; v1@1412.5,3021.56 ccw(c1388.96,3045.09) 1422.24,3045.09 cw(c1388.96,3045.09) v1@1412.5,3021.56
  Bottom Layer w8: v1(859.25,1984.25) 859.25,2034.45 912.94,2088.14 1163.7,2088.14 1312.01,2236.45 1312.01,2917.32 1411.42,3016.73 v1(1417.32,3016.73) ; 1407.68,3007.32 ccw(c1403.37,3023.38) v1@1418.38,3016.23 ; 859.25,2000.73 cw(c842.77,2000.73) 854.42,1989.08 ccw(c842.77,2000.73) 859.25,2000.73 ; 859.25,2000.73 ccw(c875.73,2000.73) 864.08,1989.08 cw(c875.73,2000.73) 859.25,2000.73 ; 1395.59,3000.9 cw(c1417.32,2979.17) 1417.32,3009.91 ccw(c1417.32,2979.17) 1395.59,3000.9
CH5-1: P12.1 U2.16 | length 2568.7
  Top Layer w8: v1@822.67,1989.41 cw(c833.43,1987.21) 830.59,1997.81 ; v1(823.82,1989.17) 852.36,2017.72 U2.16@852.36,2059.05 ; v1@824.05,1988.02 ccw(c821.85,1998.78) 832.46,1995.94 ; v1@1371.88,3019.92 cw(c1382.64,3017.72) 1379.8,3028.32 ; v1(1373.03,3019.68) 1401.57,3048.23 1401.57,3351.38 1460.63,3410.43 P12.1@1533.46,3410.43 ; v1@1373.27,3018.54 ccw(c1371.06,3029.29) 1381.67,3026.45 ; 835.47,2000.83 cw(c823.82,2012.48) 823.82,1996 ccw(c823.82,2012.48) 835.47,2000.83 ; 835.47,2000.83 ccw(c847.13,1989.17) 830.65,1989.17 cw(c847.13,1989.17) 835.47,2000.83 ; 1384.69,3031.34 cw(c1373.03,3042.99) 1373.03,3026.51 ccw(c1373.03,3042.99) 1384.69,3031.34 ; 1384.69,3031.34 ccw(c1396.34,3019.68) 1379.86,3019.68 cw(c1396.34,3019.68) 1384.69,3031.34 ; 1471.84,3410.43 cw(c1471.84,3348.81) 1515.41,3392.38 ccw(c1471.84,3348.81) 1471.84,3410.43 ; 1471.83,3410.43 ccw(c1471.83,3472.06) 1515.41,3428.48 cw(c1471.83,3472.06) 1471.83,3410.43 ; 1491.15,3410.43 cw(c1491.15,3368.12) 1521.07,3398.04 ccw(c1491.15,3368.12) 1491.15,3410.43 ; 1491.15,3410.43 ccw(c1491.15,3452.75) 1521.07,3422.83 cw(c1491.15,3452.75) 1491.15,3410.43
  Bottom Layer w8: v1(823.82,1989.17) 823.82,2018.81 907.15,2102.14 1157.9,2102.14 1298.01,2242.25 1298.01,2944.66 v1(1373.03,3019.68) ; 823.82,2005.65 cw(c807.34,2005.65) 818.99,1994 ccw(c807.34,2005.65) 823.82,2005.65 ; 823.82,2005.65 ccw(c840.3,2005.65) 828.65,1994 cw(c840.3,2005.65) 823.82,2005.65 ; 1361.38,3008.03 cw(c1373.03,2996.38) 1373.03,3012.86 ccw(c1373.03,2996.38) 1361.38,3008.03 ; 1361.38,3008.03 ccw(c1349.72,3019.68) 1366.2,3019.68 cw(c1349.72,3019.68) 1361.38,3008.03
CH6: P14.1 U2.18 | length 1916.4
  Top Layer w8: U2.18@812.99,2059.05 812.99,2104.33 ; v1(824.84,2113.29) 821.95,2113.29 812.99,2104.33 ; 812.99,2104.33 cw(c819.93,2097.39) 822.83,2106.77 ccw(c819.93,2097.39) 812.99,2104.33 ; 815.23,2106.57 ccw(c808.51,2113.29) 818.02,2113.29 cw(c808.51,2113.29) 815.23,2106.57
  Bottom Layer w8: P14.1@119.09,2990.16 318.9,2990.16 477.36,2831.69 477.36,2238.26 588.66,2126.97 647.64,2126.97 677.17,2156.5 781.64,2156.5 v1(824.84,2113.29) ; 161.41,2990.16 cw(c161.41,3032.47) 131.49,3002.55 ccw(c161.41,3032.47) 161.41,2990.16 ; 161.41,2990.16 ccw(c161.41,2947.84) 131.49,2977.76 cw(c161.41,2947.84) 161.41,2990.16 ; 180.72,2990.16 cw(c180.72,3051.78) 137.15,3008.21 ccw(c180.72,3051.78) 180.72,2990.16 ; 180.73,2990.16 ccw(c180.73,2928.53) 137.15,2972.11 cw(c180.73,2928.53) 180.73,2990.16 ; 813.19,2124.95 cw(c801.54,2113.29) 818.02,2113.29 ccw(c801.54,2113.29) 813.19,2124.95 ; 813.19,2124.95 ccw(c824.84,2136.6) 824.84,2120.12 cw(c824.84,2136.6) 813.19,2124.95
CH7: P15.1 U2.17 | length 2004.4
  Top Layer w8: U2.17@832.68,2059.05 832.68,2087.6 861.22,2116.14 v1(864.17,2116.14) ; 855.97,2107.12 ccw(c852.45,2120.25) v1@865.28,2115.75 ; 847.48,2102.4 cw(c864.17,2085.71) 864.17,2109.31 ccw(c864.17,2085.71) 847.48,2102.4 ; 854.61,2109.53 ccw(c847.99,2116.14) 857.35,2116.14 cw(c847.99,2116.14) 854.61,2109.53
  Bottom Layer w8: v1(864.17,2116.14) 1152.1,2116.14 1284.01,2248.05 1284.01,2973.97 1378.94,3068.9 P15.1@1533.46,3068.9 ; 880.65,2116.14 cw(c880.65,2132.62) 869,2120.97 ccw(c880.65,2132.62) 880.65,2116.14 ; 880.65,2116.14 ccw(c880.65,2099.66) 869,2111.31 cw(c880.65,2099.66) 880.65,2116.14 ; 1471.83,3068.9 cw(c1471.83,3007.27) 1515.41,3050.85 ccw(c1471.83,3007.27) 1471.83,3068.9 ; 1471.84,3068.9 ccw(c1471.84,3130.52) 1515.41,3086.95 cw(c1471.84,3130.52) 1471.84,3068.9 ; 1491.15,3068.9 cw(c1491.15,3026.58) 1521.07,3056.5 ccw(c1491.15,3026.58) 1491.15,3068.9 ; 1491.15,3068.9 ccw(c1491.15,3111.21) 1521.07,3081.29 cw(c1491.15,3111.21) 1491.15,3068.9
CHA0: K1.1 U2.38 | length 3158.8
  Top Layer w10: v2(622.05,1055.12) 650.59,1055.12 741.14,964.57 v2(793.31,964.57) ; U2.38@714.57,1736.22 v1(714.57,1802.17) ; v2(1004.92,550.2) 1083.66,628.94 v2(1083.66,637.8) ; v2(1185.04,659.45) 1338.58,659.45 K1.1@1348.43,669.29 ; 1241.69,659.45 ccw(c1241.69,776.03) K1.1@1324.12,693.59 ; 1265.83,659.45 ccw(c1265.83,751.89) K1.1@1331.19,686.52 ; 1289.21,659.45 cw(c1289.21,610.08) K1.1@1324.12,644.99 ; 1289.97,659.45 ccw(c1289.97,727.75) K1.1@1338.26,679.45 ; 636.11,1055.12 cw(c636.11,1069.18) 626.17,1059.24 ccw(c636.11,1069.18) 636.11,1055.12 ; 636.11,1055.12 ccw(c636.11,1041.05) 626.17,1051 cw(c636.11,1041.05) 636.11,1055.12 ; 714.57,1788.1 cw(c728.63,1788.1) 718.69,1798.05 ccw(c728.63,1788.1) 714.57,1788.1 ; 714.57,1788.1 ccw(c700.5,1788.1) 710.45,1798.05 cw(c700.5,1788.1) 714.57,1788.1 ; 779.24,964.57 cw(c779.24,950.5) 789.19,960.45 ccw(c779.24,950.5) 779.24,964.57 ; 779.24,964.57 ccw(c779.24,978.63) 789.19,968.69 cw(c779.24,978.63) 779.24,964.57 ; 1014.87,560.14 cw(c1004.92,570.09) 1004.92,556.02 ccw(c1004.92,570.09) 1014.87,560.14 ; 1014.87,560.14 ccw(c1024.81,550.2) 1010.75,550.2 cw(c1024.81,550.2) 1014.87,560.14 ; 1199.11,659.45 cw(c1199.11,673.52) 1189.16,663.57 ccw(c1199.11,673.52) 1199.11,659.45 ; 1199.11,659.45 ccw(c1199.11,645.38) 1189.16,655.33 cw(c1199.11,645.38) 1199.11,659.45 ; 1067.45,612.73 ccw(c1042.38,637.8) 1077.83,637.8 cw(c1042.38,637.8) 1067.45,612.73
  Bottom Layer w10: v2(622.05,1055.12) 635.83,1068.9 635.83,1708.66 714.57,1787.4 v1(714.57,1802.17) ; 701.97,1776.91 cw(c734.12,1768.3) v1@717.48,1797.12 ; v2(793.31,964.57) 849.41,908.46 849.41,705.71 v2(1004.92,550.2) ; v2(1083.66,637.8) 1163.39,637.8 v2(1185.04,659.45) ; 631.99,1065.06 cw(c622.05,1075.01) 622.05,1060.94 ccw(c622.05,1075.01) 631.99,1065.06 ; 631.99,1065.06 ccw(c641.94,1055.12) 627.87,1055.12 cw(c641.94,1055.12) 631.99,1065.06 ; 714.57,1788.1 cw(c728.63,1788.1) 718.69,1798.05 ccw(c728.63,1788.1) 714.57,1788.1 ; 714.57,1788.1 ccw(c700.5,1788.1) 710.45,1798.05 cw(c700.5,1788.1) 714.57,1788.1 ; 803.25,954.62 cw(c813.2,964.57) 799.13,964.57 ccw(c813.2,964.57) 803.25,954.62 ; 803.25,954.62 ccw(c793.31,944.67) 793.31,958.74 cw(c793.31,944.67) 803.25,954.62 ; 994.97,560.14 cw(c985.03,550.2) 999.09,550.2 ccw(c985.03,550.2) 994.97,560.14 ; 994.97,560.14 ccw(c1004.92,570.09) 1004.92,556.02 cw(c1004.92,570.09) 994.97,560.14 ; 1097.73,637.8 cw(c1097.73,651.86) 1087.78,641.92 ccw(c1097.73,651.86) 1097.73,637.8 ; 1097.73,637.8 ccw(c1097.73,623.73) 1087.78,633.68 cw(c1097.73,623.73) 1097.73,637.8 ; 1175.09,649.5 cw(c1185.04,639.56) 1185.04,653.62 ccw(c1185.04,639.56) 1175.09,649.5 ; 1175.09,649.5 ccw(c1165.15,659.45) 1179.21,659.45 cw(c1165.15,659.45) 1175.09,649.5 ; 694.18,1767.02 ccw(c659.03,1802.17) 708.74,1802.17 cw(c659.03,1802.17) 694.18,1767.02 ; 711.25,1784.09 ccw(c693.17,1802.17) 718.74,1802.17 cw(c693.17,1802.17) 711.25,1784.09
  Bottom Layer w50: K1.1@1348.43,669.29 K1.1@1604.33,669.29
CHA1: K2.1 U2.33 | length 3134
  Top Layer w10: v2(576.77,1096.46) 580.71,1092.52 668.31,1092.52 762.8,998.03 v2(791.34,998.03) ; U2.33@641.73,1848.43 716.54,1848.43 v1(720.47,1852.36) ; 706.84,1850.99 cw(c710.19,1845.17) v1@715.7,1849.02 ; v2(831.69,1194.88) 981.3,1194.88 v2(1000,1213.58) ; 777.27,998.03 cw(c777.27,983.96) 787.22,993.91 ccw(c777.27,983.96) 777.27,998.03 ; 777.27,998.03 ccw(c777.27,1012.1) 787.22,1002.15 cw(c777.27,1012.1) 777.27,998.03 ; 845.76,1194.88 cw(c845.76,1208.95) 835.81,1199 ccw(c845.76,1208.95) 845.76,1194.88 ; 845.76,1194.88 ccw(c845.76,1180.81) 835.81,1190.76 cw(c845.76,1180.81) 845.76,1194.88 ; 990.05,1203.64 cw(c1000,1193.69) 1000,1207.76 ccw(c1000,1193.69) 990.05,1203.64 ; 990.05,1203.64 ccw(c980.11,1213.58) 994.17,1213.58 cw(c980.11,1213.58) 990.05,1203.64 ; v2@580.89,1100.58 ccw(c600.34,1120.03) 600.34,1092.52 cw(c600.34,1120.03) v2@580.89,1100.58 ; 696.9,1848.43 ccw(c696.9,1875.93) 716.35,1856.48 cw(c696.9,1875.93) 696.9,1848.43
  Bottom Layer w10: v2(576.77,1096.46) 578.74,1096.46 617.13,1134.84 617.13,1824.8 629.92,1837.6 693.9,1837.6 ; v1(720.47,1852.36) 708.66,1852.36 ; v2(791.34,998.03) 791.34,1154.53 v2(831.69,1194.88) ; v2(1000,1213.58) 1042.68,1213.58 1089.11,1167.15 1269.86,1167.15 1348.43,1088.58 K2.1@1348.43,1062.99 ; 1271.66,1165.35 cw(c1169.3,1062.99) K2.1@1314.06,1062.99 ; 1288.73,1148.28 cw(c1203.44,1062.99) K2.1@1324.06,1062.99 ; 1305.8,1131.21 cw(c1237.58,1062.99) K2.1@1334.06,1062.99 ; 1322.87,1114.14 cw(c1271.72,1062.99) K2.1@1344.06,1062.99 ; 1333.44,1103.57 ccw(c1348.43,1118.56) K2.1@1348.43,1097.36 ; 693.9,1837.6 cw(c716.1,1815.4) 719.79,1846.58 ccw(c716.1,1815.4) 693.9,1837.6 ; 693.9,1837.6 708.66,1852.36 ; 708.66,1852.36 cw(c708.66,1843.31) 715.85,1848.82 ccw(c708.66,1843.31) 708.66,1852.36 ; 708.66,1852.36 ccw(c708.66,1861.42) 715.85,1855.91 cw(c708.66,1861.42) 708.66,1852.36 ; 791.34,1012.1 cw(c777.27,1012.1) 787.22,1002.15 ccw(c777.27,1012.1) 791.34,1012.1 ; 791.34,1012.1 ccw(c805.41,1012.1) 795.46,1002.15 cw(c805.41,1012.1) 791.34,1012.1 ; 821.75,1184.94 cw(c831.69,1174.99) 831.69,1189.06 ccw(c831.69,1174.99) 821.75,1184.94 ; 821.75,1184.94 ccw(c811.8,1194.88) 825.87,1194.88 cw(c811.8,1194.88) 821.75,1184.94 ; 1014.07,1213.58 cw(c1014.07,1227.65) 1004.12,1217.7 ccw(c1014.07,1227.65) 1014.07,1213.58 ; 1014.07,1213.58 ccw(c1014.07,1199.52) 1004.12,1209.46 cw(c1014.07,1199.52) 1014.07,1213.58 ; v2@576.77,1102.28 ccw(c576.77,1121.1) 590.08,1107.8 cw(c576.77,1121.1) v2@576.77,1102.28 ; 708.48,1852.18 cw(c719.18,1841.47) 720.96,1856.51 ccw(c719.18,1841.47) 708.48,1852.18
  Bottom Layer w50: K2.1@1348.43,1062.99 K2.1@1604.33,1062.99
CSN: U2.25 U3.3 | length 635.2
  Top Layer w8: U2.25@641.73,2005.91 641.73,2187.99 693.9,2240.16 v1(695.87,2240.16) ; 688.14,2231.26 ccw(c684.86,2243.51) v1@696.99,2239.82 ; 680.85,2227.11 cw(c695.87,2212.1) 695.87,2233.33 ccw(c695.87,2212.1) 680.85,2227.11 ; 685.6,2231.86 ccw(c677.31,2240.16) 689.04,2240.16 cw(c677.31,2240.16) 685.6,2231.86
  Bottom Layer w8: v1(695.87,2240.16) 748.03,2292.32 748.03,2387.4 U3.3@750.2,2389.57 ; 707.52,2251.81 cw(c695.87,2263.47) 695.87,2246.98 ccw(c695.87,2263.47) 707.52,2251.81 ; 707.52,2251.81 ccw(c719.17,2240.16) 702.69,2240.16 cw(c719.17,2240.16) 707.52,2251.81 ; U3.3@740.31,2359.8 cw(c721.69,2341.17) 748.03,2341.17 ccw(c721.69,2341.17) U3.3@740.31,2359.8 ; 748.03,2338.32 cw(c778.41,2338.32) 756.93,2359.8 ccw(c778.41,2338.32) 748.03,2338.32